# EAGLE board eCog_Buses_Template (EAGLE 6.6.0)
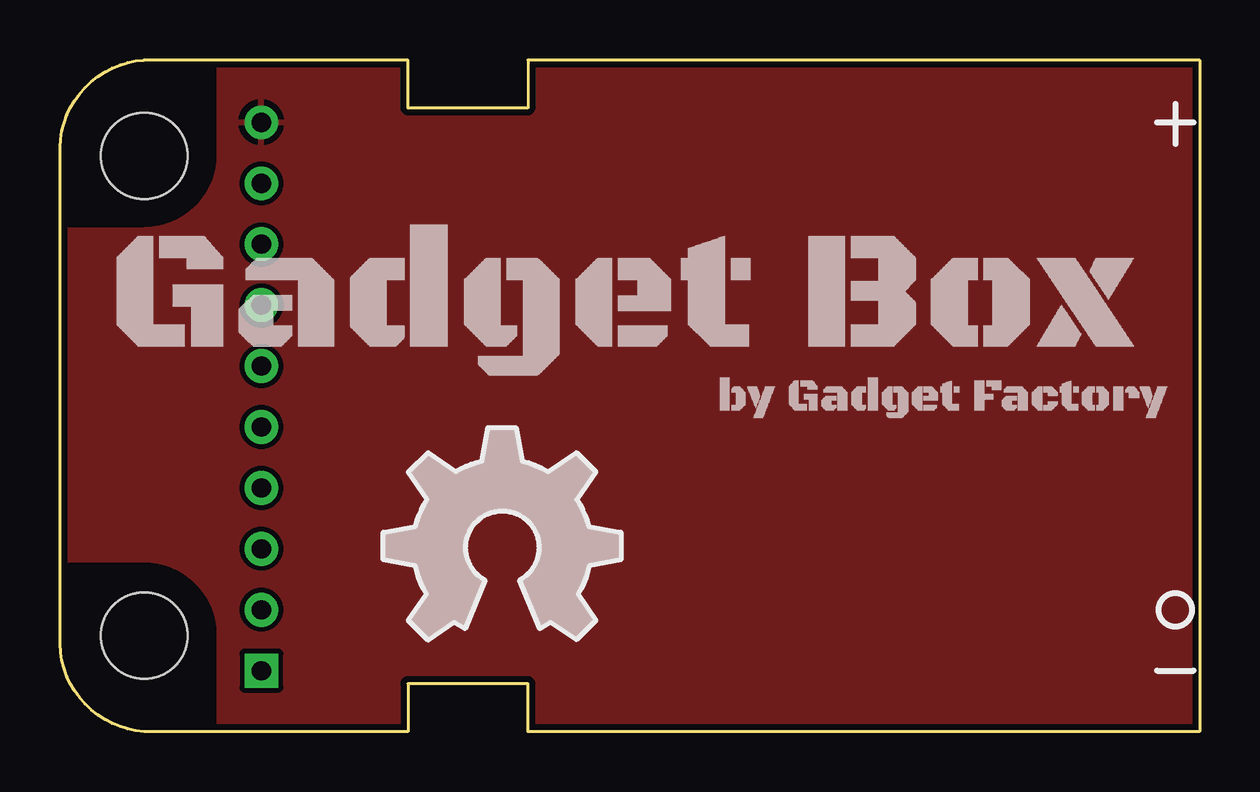
[diagram p0: board, top side]
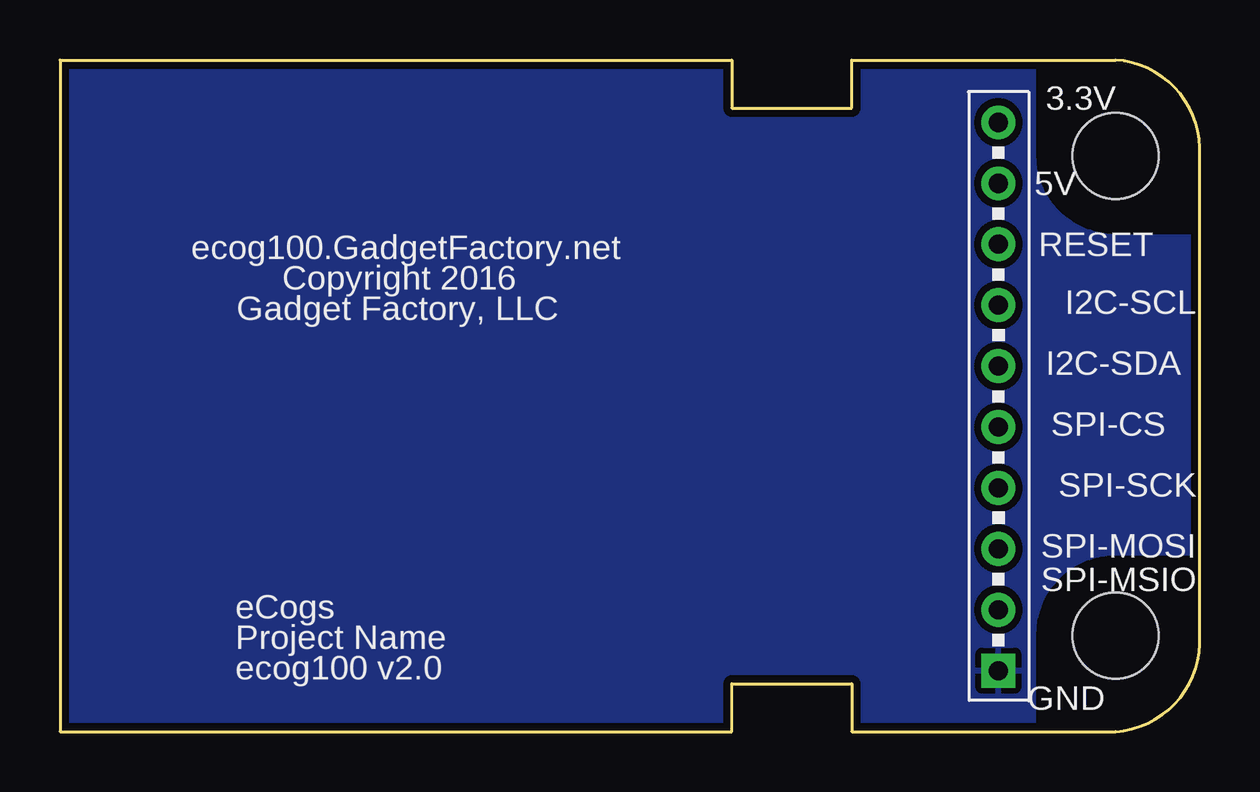
[diagram p1: board, bottom side, seen from below]

Size 47.51 x 28 mm. Coordinates in mm from the lower left corner, seen from the top.
Copper layers (1*16): Top 0.035mm / dielectric 1.5mm / Bottom 0.035mm
Design rules "SparkFun": minimum track width 8mil, minimum drill 20mil, track to track 8mil, track to pad 8mil, pad to pad 8mil, via to via 8mil, smd to smd 8mil, copper to edge 10mil, drill to drill 8mil, minimum pad ring 12mil, minimum via ring 10mil, stop-mask expansion 4mil, vias tented up to drill 25mil, thermal gap 10mil

## Footprints (pad centres in the part's own frame; a part is rotated, then mirrored left to right if it is on the bottom)
ECOG_BUSES_TH = drill 0.8: 3V3 8.89,25.4; 5V0 8.89,22.86; I2C-SCL 8.89,17.78; I2C-SDA 8.89,15.24; RESET 8.89,20.32; SPI-CS 8.89,12.7; SPI-MISO 8.89,5.08; SPI-MOSI 8.89,7.62; SPI-SCK 8.89,10.16 | drill 0.8 square: GND 8.89,2.54 | hole 3.6: 4.004,24.003; 4.004,4.003

## Placement (x,y rotation side)
ECOG  ECOG_BUSES_ROWTHROUGHHOLE  [ECOG_BUSES_TH]  -0.5,0 0 top
U$1  [GADGETBOX_TEXT]  23.63,17.78 0 top
U$2  [OSHW_FILLX350_NOTEXT]  13.47,3.81 0 top

## Library data of the parts
ECOG = eCogs
U$1 = GadgetFactory
U$2 = ohw-logo

## Nets
3V3: ECOG.3V3
GND: ECOG.GND

## Tracks (layer width: path | path; a pad name or v marks a point on that pad's centre or on a via)
3V3
  pour Top: -1.5,29 48.5,29 48.5,-1 -1.5,-1
GND
  pour Bottom (isolate 0.305): -2.5,30 49.5,30 49.5,-2 -2.5,-2

## Text on the board
bPlace: 3.3V | 5V | RESET | ecog100.GadgetFactory.net | I2C-SCL | Copyright 2016 | Gadget Factory, LLC | I2C-SDA | SPI-CS | SPI-SCK | SPI-MOSI | SPI-MSIO | eCogs | Project Name | GND | ecog100 v2.0